# Altium PCB NTC_Extension_5fach.PcbDoc
Units mm, origin at the board's own origin, x right, y up, seen from the top; angles counter-clockwise.
Board outline 139.94 x 69.05 mm, 4 copper layers (Top Layer, Flex Top, Flex Bottom, Bottom Layer), stack 0.359 mm thick; 6 components, 11 nets, 30 pads, 18 vias.
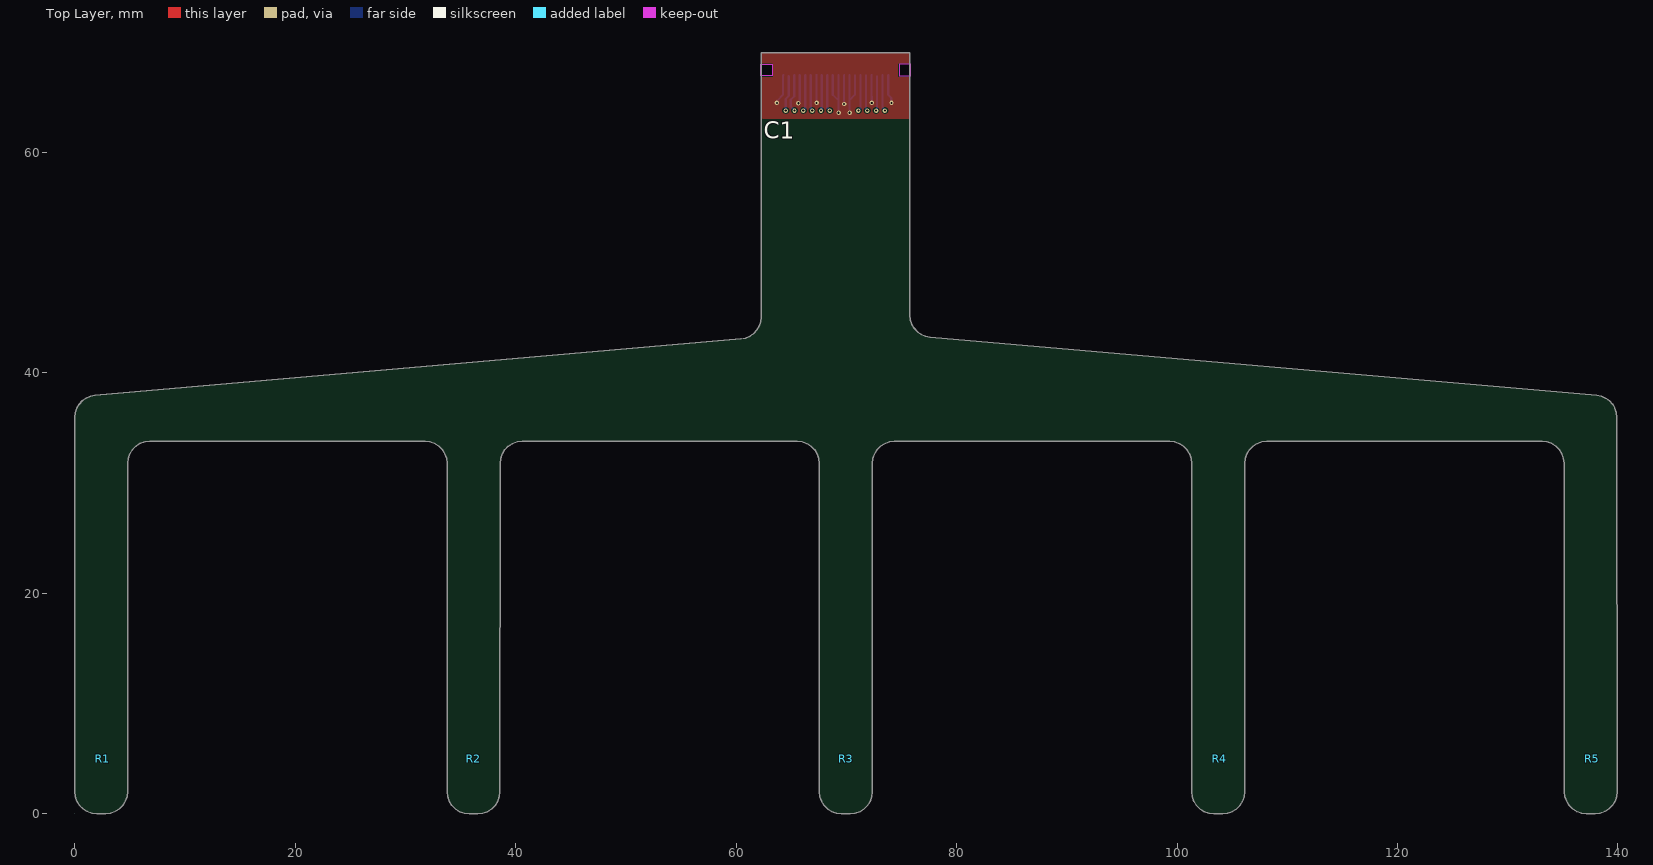
[diagram p0: Top Layer view]
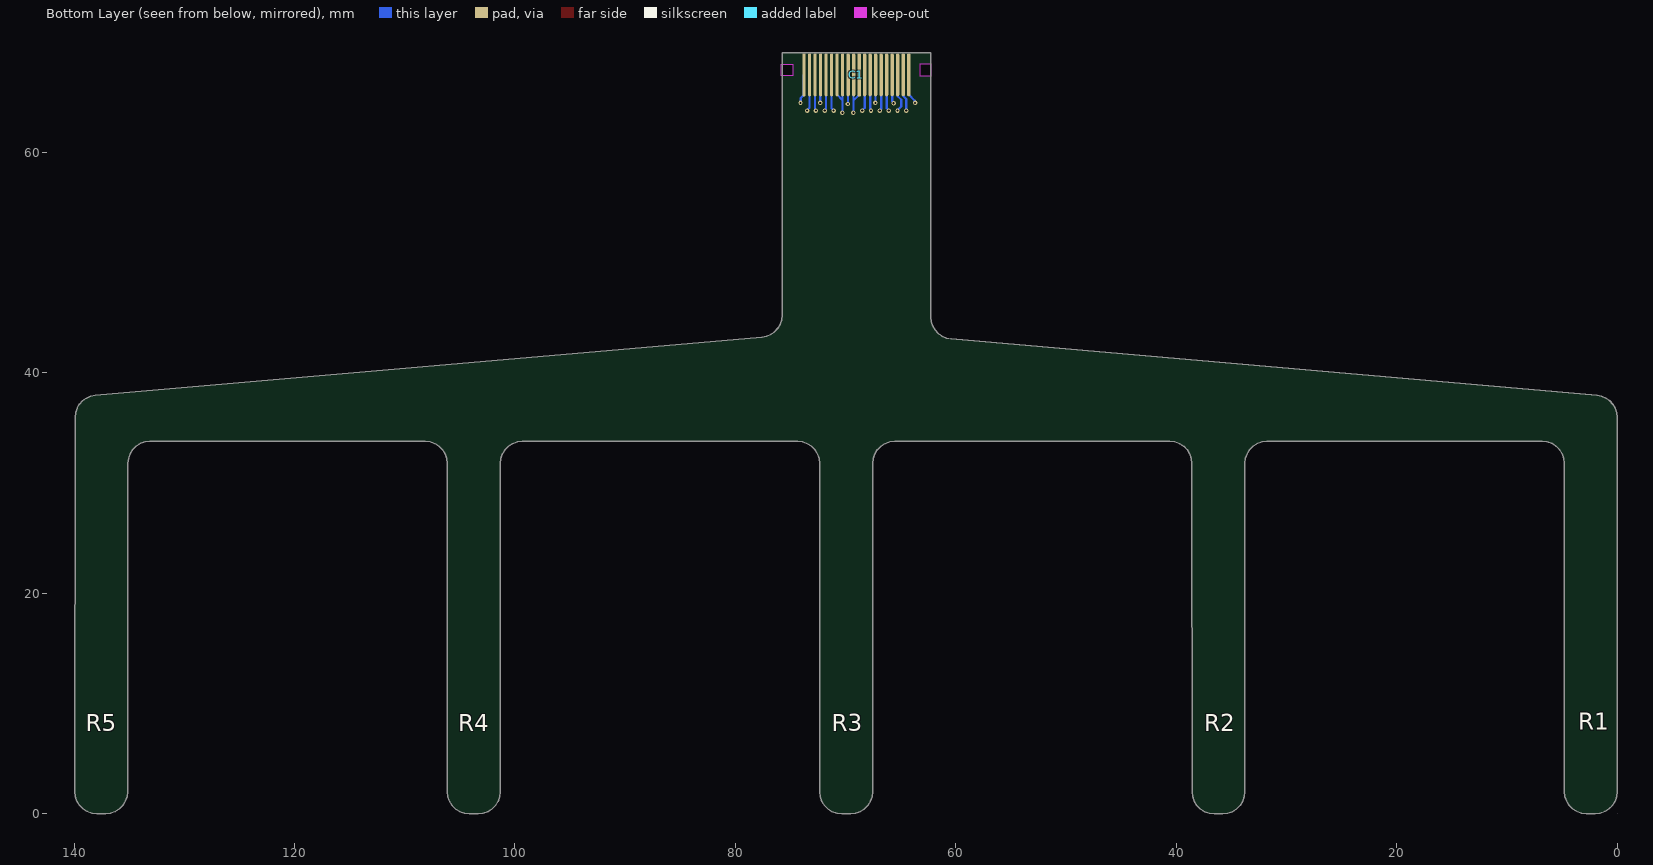
[diagram p1: Bottom Layer view, seen from below]
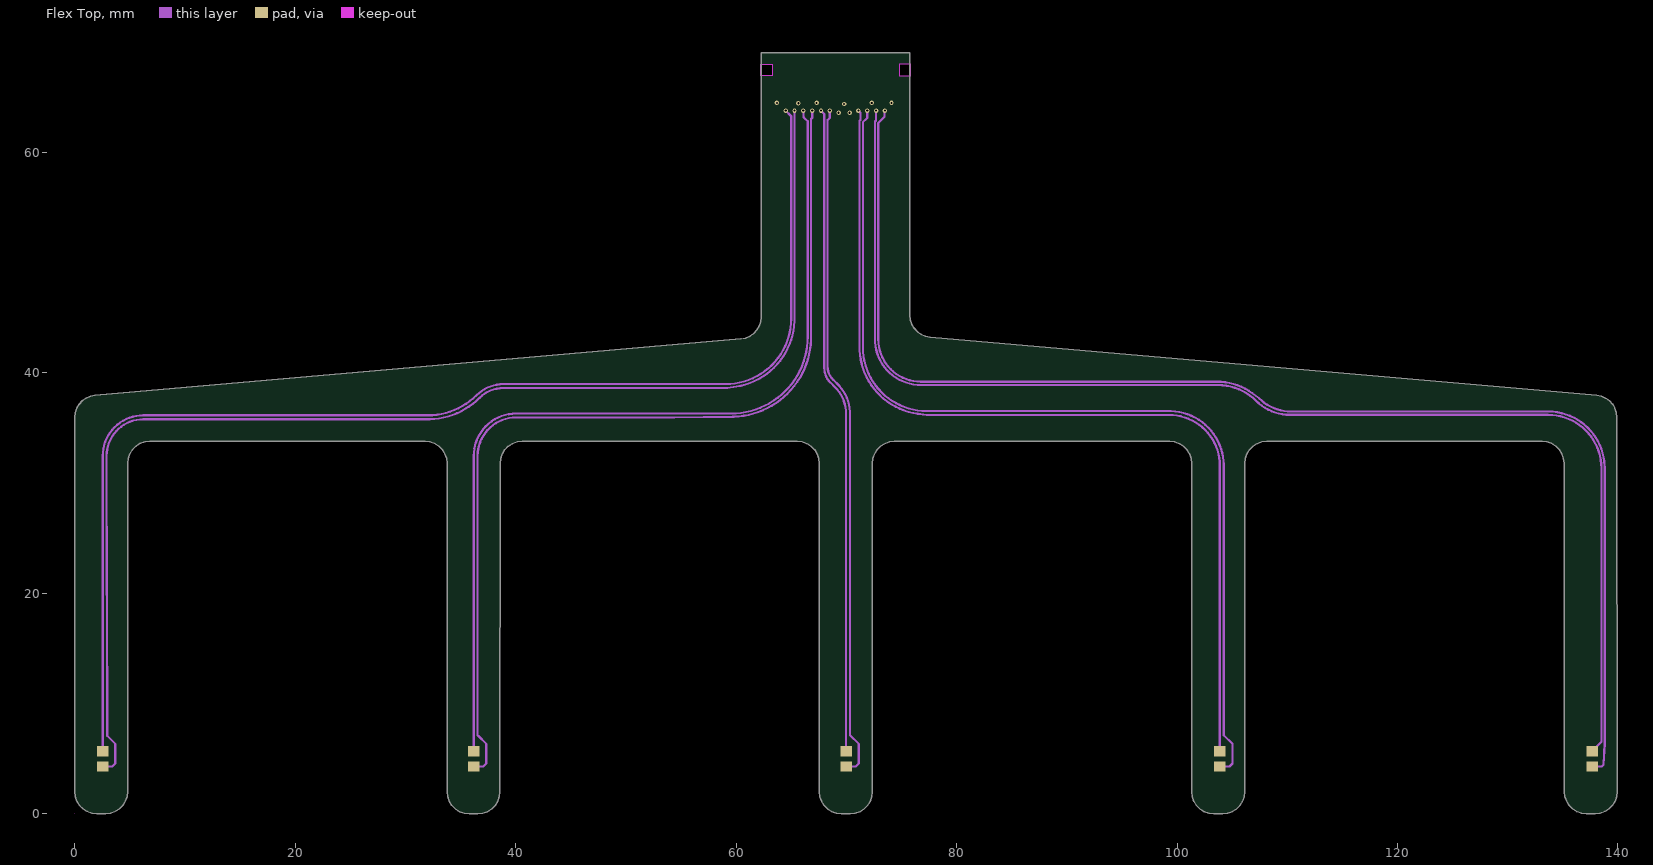
[diagram p2: Flex Top]

## Layer stack, top to bottom
Polyimide 3: solder mask 0.0125, SM-001, Dk 4
Top Layer: signal copper 0.035
Dielectric 2: core 0.086, Core-009, Dk 4.5
Adhesive 4: prepreg 0.015, PP-006, Dk 4.1
Flex Top: signal copper 0.018
Adhesive 3: prepreg 0.013, PP-006, Dk 4.1
Ployimide 2: prepreg 0.025, PP-006, Dk 4.1
Adhesive 2: prepreg 0.013, WE-ADH-0001, Dk 4.1
Flex Bottom: signal copper 0.018
Adhesive 1: prepreg 0.015, PP-006, Dk 4.1
Dielectric 1: core 0.086, Core-009, Dk 4.5
Bottom Layer: signal copper 0.035
Polyimide 1: solder mask 0.0125, SM-001, Dk 4

## Board outline
135.112,31.806 135.141,2.013 135.192,1.568 135.34,1.146 135.579,0.767 135.896,0.45 136.275,0.213 136.698,0.065 137.143,0.015 137.943,0.016 138.388,0.067 138.811,0.215 139.19,0.454 139.506,0.771 139.744,1.15 139.892,1.573 139.941,2.018 139.909,35.977 139.864,36.397 139.731,36.799 139.517,37.164 139.231,37.476 138.886,37.72 138.497,37.887 138.082,37.968 77.596,43.243 77.181,43.324 76.792,43.491 76.447,43.736 76.162,44.047 75.948,44.412 75.815,44.814 75.771,45.235 75.773,52.117 75.775,63.042 75.775,69.042 62.282,69.05 62.275,63.052 62.275,63.042 62.271,52.118 62.272,45.072 62.227,44.651 62.095,44.249 61.881,43.884 61.595,43.573 61.25,43.328 60.861,43.161 60.446,43.08 1.838,37.968 1.423,37.887 1.034,37.721 0.689,37.476 0.403,37.164 0.189,36.799 0.057,36.397 0.012,35.976 0,2.017 0.05,1.572 0.198,1.149 0.436,0.77 0.752,0.453 1.132,0.215 1.554,0.067 1.999,0.017 2.799,0.016 3.244,0.066 3.667,0.214 4.046,0.452 4.363,0.769 4.602,1.148 4.75,1.571 4.8,2.016 4.81,31.807 4.861,32.252 5.009,32.675 5.247,33.054 5.564,33.371 5.943,33.609 6.366,33.757 6.811,33.807 31.785,33.799 32.23,33.749 32.653,33.601 33.032,33.362 33.349,33.045 33.587,32.666 33.735,32.243 33.785,31.798 33.779,2.006 33.829,1.561 33.976,1.139 34.215,0.759 34.531,0.443 34.91,0.204 35.333,0.056 35.778,0.006 36.578,0.006 37.023,0.056 37.446,0.204 37.825,0.442 38.142,0.759 38.38,1.138 38.528,1.56 38.579,2.005 38.585,31.797 38.635,32.242 38.783,32.665 39.022,33.044 39.338,33.361 39.718,33.599 40.14,33.747 40.585,33.797 65.56,33.792 66.005,33.742 66.428,33.594 66.807,33.356 67.123,33.039 67.362,32.66 67.51,32.237 67.56,31.792 67.556,2 67.606,1.555 67.754,1.132 67.993,0.753 68.309,0.437 68.688,0.198 69.111,0.05 69.556,0 70.356,0 70.801,0.05 71.224,0.198 71.603,0.436 71.92,0.753 72.158,1.132 72.306,1.555 72.356,2 72.36,31.792 72.41,32.237 72.558,32.659 72.796,33.038 73.113,33.355 73.492,33.593 73.915,33.741 74.36,33.791 99.335,33.792 99.78,33.742 100.203,33.594 100.582,33.356 100.899,33.04 101.137,32.66 101.285,32.238 101.335,31.793 101.339,2.001 101.389,1.556 101.537,1.133 101.775,0.754 102.092,0.437 102.471,0.199 102.894,0.051 103.339,0.001 104.139,0.001 104.584,0.052 105.007,0.2 105.386,0.438 105.703,0.755 105.941,1.134 106.089,1.557 106.139,2.002 106.135,31.793 106.185,32.239 106.333,32.661 106.571,33.041 106.888,33.357 107.267,33.596 107.69,33.744 108.135,33.794 133.11,33.804 133.555,33.755 133.978,33.607 134.358,33.369 134.675,33.052 134.913,32.673 135.061,32.251
cut-out: 62.227,67.99 63.27,67.99 63.27,66.94 62.227,66.94
cut-out: 75.83,67.99 74.78,67.99 74.78,66.94 75.83,66.94
cut-out: 0,0
cut-out: 0,0
cut-out: 0,0
cut-out: 0,0
cut-out: 0,0
board region STIFF1: 75.775,63.042 75.775,63.045 75.775,69.042 62.282,69.05 62.275,63.052 62.275,63.042
board region FLEX: 139.892,1.573 139.941,2.018 139.909,35.977 139.864,36.397 139.731,36.799 139.517,37.164 139.231,37.476 138.886,37.72 138.497,37.887 138.082,37.968 77.596,43.243 77.181,43.324 76.792,43.491 76.447,43.736 76.162,44.047 75.948,44.412 75.815,44.814 75.771,45.235 75.773,52.117 75.775,63.042 62.275,63.042 62.271,52.118 62.272,45.072 62.227,44.651 62.095,44.249 61.881,43.884 61.595,43.572 61.25,43.328 60.861,43.161 60.446,43.08 1.838,37.968 1.423,37.887 1.034,37.72 0.689,37.476 0.403,37.164 0.189,36.799 0.057,36.397 0.012,35.976 0,2.017 0.05,1.572 0.198,1.149 0.436,0.77 0.753,0.453 1.132,0.215 1.554,0.067 1.999,0.017 2.799,0.016 3.244,0.066 3.667,0.214 4.046,0.452 4.363,0.769 4.602,1.148 4.75,1.571 4.8,2.016 4.81,31.807 4.861,32.252 5.009,32.675 5.247,33.054 5.564,33.371 5.943,33.609 6.366,33.757 6.811,33.807 31.785,33.799 32.23,33.749 32.653,33.601 33.032,33.362 33.349,33.045 33.587,32.666 33.735,32.243 33.785,31.798 33.779,2.006 33.829,1.561 33.976,1.139 34.215,0.759 34.531,0.443 34.91,0.204 35.333,0.056 35.778,0.006 36.578,0.006 37.023,0.056 37.446,0.204 37.825,0.442 38.142,0.759 38.38,1.138 38.528,1.56 38.579,2.005 38.585,31.797 38.635,32.242 38.783,32.665 39.022,33.044 39.338,33.361 39.718,33.599 40.14,33.747 40.585,33.797 65.56,33.792 66.005,33.742 66.428,33.594 66.807,33.356 67.123,33.039 67.362,32.66 67.51,32.237 67.56,31.792 67.556,2 67.606,1.555 67.754,1.132 67.993,0.753 68.309,0.437 68.688,0.198 69.111,0.05 69.556,0 70.356,0 70.801,0.05 71.224,0.198 71.603,0.436 71.92,0.753 72.158,1.132 72.306,1.555 72.356,2 72.36,31.792 72.41,32.237 72.558,32.659 72.796,33.039 73.113,33.355 73.492,33.593 73.915,33.741 74.36,33.791 99.335,33.792 99.78,33.742 100.203,33.594 100.582,33.356 100.899,33.04 101.137,32.66 101.285,32.238 101.335,31.793 101.339,2.001 101.389,1.556 101.537,1.133 101.775,0.754 102.092,0.437 102.471,0.199 102.894,0.051 103.339,0.001 104.139,0.001 104.584,0.052 105.007,0.2 105.386,0.438 105.703,0.755 105.941,1.134 106.089,1.557 106.139,2.002 106.135,31.793 106.185,32.239 106.333,32.661 106.571,33.041 106.888,33.357 107.267,33.596 107.69,33.744 108.135,33.794 133.11,33.804 133.555,33.755 133.978,33.607 134.358,33.369 134.675,33.052 134.913,32.673 135.061,32.251 135.112,31.806 135.141,2.013 135.192,1.568 135.34,1.146 135.579,0.767 135.896,0.45 136.275,0.213 136.698,0.065 137.143,0.015 137.943,0.016 138.388,0.067 138.811,0.215 139.19,0.454 139.506,0.771 139.744,1.15

## Design rules (kind name [scope] priority, off if disabled: settings)
Clearance [All] p1: gap=0.1 ignorepadtopadclearanceinfootprint=FALSE
DiffPairsRouting [All] p1: maxlimit=0.254 minlimit=0.254 mostfreqgap=0.254 toplayer_minwidth=0.381 toplayer_maxwidth=0.381 toplayer_prefwidth=0.381 midlayer1_minwidth=0.381 midlayer1_maxwidth=0.381 midlayer1_prefwidth=0.381 midlayer2_minwidth=0.381 midlayer2_maxwidth=0.381 midlayer2_prefwidth=0.381 bottomlayer_minwidth=0.381 bottomlayer_maxwidth=0.381 bottomlayer_prefwidth=0.381 substack1={291D20B5-A589-4DCC-A0D5-CD3C578C308D} toplayer_{291d20b5-a589-4dcc-a0d5-cd3c578c308d}_minwidth=0.381 toplayer_{291d20b5-a589-4dcc-a0d5-cd3c578c308d}_maxwidth=0.381 toplayer_{291d20b5-a589-4dcc-a0d5-cd3c578c308d}_prefwidth=0.381 midlayer1_{291d20b5-a589-4dcc-a0d5-cd3c578c308d}_minwidth=0.381 midlayer1_{291d20b5-a589-4dcc-a0d5-cd3c578c308d}_maxwidth=0.381 midlayer1_{291d20b5-a589-4dcc-a0d5-cd3c578c308d}_prefwidth=0.381 midlayer2_{291d20b5-a589-4dcc-a0d5-cd3c578c308d}_minwidth=0.381 midlayer2_{291d20b5-a589-4dcc-a0d5-cd3c578c308d}_maxwidth=0.381 midlayer2_{291d20b5-a589-4dcc-a0d5-cd3c578c308d}_prefwidth=0.381 bottomlayer_{291d20b5-a589-4dcc-a0d5-cd3c578c308d}_minwidth=0.381 bottomlayer_{291d20b5-a589-4dcc-a0d5-cd3c578c308d}_maxwidth=0.381 bottomlayer_{291d20b5-a589-4dcc-a0d5-cd3c578c308d}_prefwidth=0.381 maxuncoupledlength=12.7
PolygonConnect PolygonConnect_1 [All vs IsNamedPolygon('GND_L01_P000')] p1: connectstyle=Relief reliefconductorwidth=0.254 reliefentries=4 polygonreliefangle="90 Angle" airgapwidth=0.254
PolygonConnect [All] p2: connectstyle=Relief reliefconductorwidth=0.254 reliefentries=4 polygonreliefangle="90 Angle" airgapwidth=0.254
RoutingVias [All] p1: holewidth=0.711 width=1.27 viastyle="Through Hole" minholewidth=0.711 minwidth=1.27 maxholewidth=0.711 maxwidth=1.27
SolderMaskExpansion [All] p1: expansion=0.102 istentingtop=FALSE
Width [All] p1: maxlimit=0.5 minlimit=0.1 preferedwidth=0.25 substack1={291D20B5-A589-4DCC-A0D5-CD3C578C308D} toplayer_{291d20b5-a589-4dcc-a0d5-cd3c578c308d}_minwidth=0.254 toplayer_{291d20b5-a589-4dcc-a0d5-cd3c578c308d}_maxwidth=0.254 toplayer_{291d20b5-a589-4dcc-a0d5-cd3c578c308d}_prefwidth=0.254 bottomlayer_{291d20b5-a589-4dcc-a0d5-cd3c578c308d}_minwidth=0.254 bottomlayer_{291d20b5-a589-4dcc-a0d5-cd3c578c308d}_maxwidth=0.254 bottomlayer_{291d20b5-a589-4dcc-a0d5-cd3c578c308d}_prefwidth=0.254 minimp=50.000000 maximp=50.000000 favimp=50.000000
29 further rules are at their usual default settings.

## Components (designator, comment, footprint, x,y, rotation, side; value= is the part's Value field where it differs from the comment)
C1 "20Pin Molex FPC" "Molex 20 Pin FPC" 62.28,65.05 r0 top
R1 "ERT-J1VR103J" RESC1608X90X30ML15T20 2.54,4.997 r90 top
R2 "ERT-J1VR103J" RESC1608X90X30ML15T20 36.195,4.997 r90 top
R3 "ERT-J1VR103J" RESC1608X90X30ML15T20 69.977,4.997 r90 top
R4 "ERT-J1VR103J" RESC1608X90X30ML15T20 103.886,4.997 r90 top
R5 "ERT-J1VR103J" RESC1608X90X30ML15T20 137.668,4.997 r90 top

## Footprints (in the part's own frame and the unit in brackets; to place one, negate y for a bottom-side part, rotate by r counter-clockwise, add the part's x,y. Pads: shape width x height; smd on the part's side, far side on the other; paste and mask are expansions set on the pad)
"Molex 20 Pin FPC" [mm]
  rrect50% 0.3x3.9 smd far side: 1(11.5,2) 11(6.5,2)
  oval 0.3x3.9 smd far side: 2(11,2) 3(10.5,2) 4(10,2) 5(9.5,2) 6(9,2) 7(8.5,2) 8(8,2) 9(7.5,2) 10(7,2) 12(6,2) 13(5.5,2) 14(5,2) 15(4.5,2) 16(4,2) 17(3.5,2) 18(3,2) 19(2.5,2) 20(2,2)
RESC1608X90X30ML15T20 [mm] "Chip Resistor, 2-Leads, Body 1.60x0.80mm, IPC Low Density"
  rect 0.95x1.05 on Mid1: 1(-0.7,0) 2(0.7,0)
  body extent -0.88,-0.48 0.87,0.48, height 0.9

## Part data
C1: "Flex PCB part for the Molex 20pin FCC"
R1 R2 R3 R4 R5: library part CMP-2000-00869-1, Manufacturer=Panasonic, Part Number=ERT-J1VR103J

## Via types
v1: diameter 0.4, hole 0.2, Top Layer to Bottom Layer, 18 vias

## Nets (pads, with @x,y where several pads share a name; then routed paths per layer and width w, separated by ;. In a path a pad name is that pad's centre, name@x,y a point inside that pad or via, vN(x,y) a via of type N, cw(c..) or ccw(c..) an arc to the next point about the centre after c; other vN are vias at no path point)
GND: C1.1 C1.4 C1.7 C1.8 C1.9 C1.10 C1.11 C1.14 C1.17 C1.20 | length 27.7
  Bottom Layer w0.2: v1(63.7,64.5) 63.738,64.538 63.738,64.701 64.244,65.207 64.244,67.007 C1.20@64.277,67.04 ; v1(65.649,64.475) 65.649,64.515 65.777,64.643 C1.17@65.777,67.04 ; C1.14@67.277,67.04 67.286,67.031 67.286,65.095 67.3,65.081 v1(67.3,64.5) ; C1.11@68.777,67.04 68.777,65.24 69.277,64.74 ; C1.10@69.277,67.04 69.277,64.74 ; v1(69.3,63.6) 69.3,64.717 69.277,64.74 ; C1.9@69.777,67.04 69.786,67.031 69.786,64.995 69.8,64.981 v1(69.8,64.4) ; C1.8@70.277,67.04 70.277,64.227 70.3,64.204 v1(70.3,63.6) ; 70.3,64.763 70.777,65.24 C1.7@70.777,67.04 ; C1.4@72.277,67.04 72.286,67.031 72.286,65.095 72.3,65.081 v1(72.3,64.5) ; C1.1@73.777,67.04 73.8,67.017 73.8,65.217 74.072,64.945 74.072,64.528 v1(74.1,64.5)
NetC1_2: C1.2 R5.1 | length 124.1
  Flex Top w0.2: v1(73.5,63.8) 73.472,63.772 73.472,63.251 73.263,63.042 72.9,62.679 72.9,43.04 ccw(c76.74,43.05) 76.74,39.21 103.952,39.21 103.994,39.207 104.379,39.157 cw(c103.713,33.984) 106.841,38.158 107.442,37.708 ccw(c110.361,40.63) 110.356,36.5 134.099,36.5 134.522,36.429 cw(c133.669,31.369) 138.795,31.598 138.8,31.484 138.8,6.404 138.688,4.445 138.629,4.387 138.539,4.297 R5.1
  Bottom Layer w0.2: C1.2@73.277,67.04 73.277,64.062 73.5,63.84 v1(73.5,63.8)
NetC1_3: C1.3 R5.2 | length 121.7
  Flex Top w0.2: v1(72.7,63.8) 72.7,63.042 72.7,62.903 72.6,62.803 72.6,42.916 72.609,42.783 ccw(c76.74,43.05) 76.079,38.963 76.468,38.9 103.712,38.9 cw(c103.713,33.984) 107.188,37.462 ccw(c110.231,40.5) 110.234,36.2 133.666,36.2 cw(c133.669,31.369) 138.5,31.364 138.5,6.529 138.441,6.47 R5.2
  Bottom Layer w0.2: v1(72.7,63.8) 72.7,63.84 72.777,63.917 C1.3@72.777,66.917
NetC1_5: C1.5 R4.1 | length 92.4
  Flex Top w0.2: v1(71.9,63.8) 71.9,63.142 71.8,63.042 71.5,62.742 71.5,42.328 ccw(c77.291,42.337) 77.286,36.546 99.424,36.546 ccw(c99.465,36.796) 99.455,36.542 cw(c99.277,31.583) 104.18,32.35 cw(c99.532,31.591) 104.24,31.729 104.24,7.136 105.029,6.347 105.029,4.569 104.757,4.297 R4.1
  Bottom Layer w0.2: C1.5@71.777,67.04 71.777,63.962 71.9,63.84 v1(71.9,63.8)
NetC1_6: C1.6 R4.2 | length 89.6
  Flex Top w0.2: v1(71.1,63.8) 71.1,63.769 71.286,63.583 71.286,63.042 71.286,62.952 71.2,62.866 71.2,42.205 71.206,42.073 ccw(c77.291,42.337) 76.487,36.299 77.294,36.192 99.277,36.192 cw(c99.277,31.583) 103.886,31.582 R4.2
  Bottom Layer w0.2: v1(71.1,63.8) 71.1,63.84 71.277,64.017 C1.6@71.277,67.04
NetC1_12: C1.12 R3.1 | length 64.8
  Flex Top w0.2: v1(68.5,63.8) 68.5,63.142 68.4,63.042 68.3,62.942 68.3,40.583 ccw(c69.968,40.583) 68.817,39.376 69.333,38.86 ccw(c69.544,39.002) 69.355,38.831 cw(c66.57,36.304) 70.327,36.486 70.331,36.451 70.331,34.693 70.331,7.136 71.12,6.347 71.12,4.569 70.848,4.297 R3.1
  Bottom Layer w0.2: C1.12@68.277,67.04 68.277,64.062 68.5,63.84 v1(68.5,63.8)
NetC1_13: C1.13 R3.2 | length 62.1
  Flex Top w0.2: v1(67.7,63.8) 68,63.5 68,63.042 68,40.442 ccw(c69.809,40.442) 68.53,39.163 68.979,38.714 cw(c66.57,36.304) 69.977,36.304 R3.2
  Bottom Layer w0.2: v1(67.7,63.8) 67.7,63.84 67.777,63.917 C1.13@67.777,67.04
NetC1_15: C1.15 R2.1 | length 89.7
  Flex Top w0.2: R2.1 37.066,4.297 37.338,4.569 37.338,6.347 36.623,7.061 36.549,7.136 36.549,32.477 cw(c40.041,32.473) 40.037,35.965 54.382,35.965 59.67,36.019 59.793,36.023 ccw(c59.547,43.272) 66.796,43.026 66.8,43.147 66.8,63.042 66.8,63.056 66.858,63.114 66.9,63.156 v1(66.9,63.8)
  Bottom Layer w0.2: C1.15@66.777,67.04 66.777,63.962 66.9,63.84 v1(66.9,63.8)
NetC1_16: C1.16 R2.2 | length 87.3
  Flex Top w0.2: R2.2 36.195,32.471 ; 36.195,32.473 cw(c40.041,32.473) 40.041,36.319 59.546,36.319 ccw(c59.547,43.272) 66.5,43.272 66.5,62.828 66.286,63.042 66.109,63.219 66.109,63.791 v1(66.1,63.8)
  Bottom Layer w0.2: v1(66.1,63.8) 66.1,63.84 66.277,64.017 C1.16@66.277,67.04
NetC1_18: C1.18 R1.1 | length 120.5
  Flex Top w0.2: R1.1 3.411,4.297 3.683,4.569 3.683,6.347 2.953,7.077 2.894,32.47 cw(c6.222,32.473) 6.217,35.8 32.188,35.8 cw(c32.222,35.549) 32.215,35.803 ccw(c32.041,42.414) 36.719,37.739 cw(c38.877,35.577) 38.873,38.632 47.785,38.632 59.201,38.632 60.029,38.762 ccw(c59.057,44.928) 65.295,44.69 65.3,44.806 65.3,63.042 v1(65.3,63.8)
  Bottom Layer w0.2: C1.18@65.277,67.04 65.268,67.031 65.268,65.093 64.96,64.785 64.96,64.179 65.3,63.84 v1(65.3,63.8)
NetC1_19: C1.19 R1.2 | length 117.8
  Flex Top w0.2: R1.2 2.54,32.471 cw(c6.222,32.473) 6.222,36.154 32.041,36.154 ccw(c32.041,42.414) 36.468,37.989 cw(c38.877,35.577) 38.877,38.986 59.055,38.986 ccw(c59.057,44.928) 65,44.931 65,63.042 65,63.3 64.941,63.359 v1(64.5,63.8)
  Bottom Layer w0.2: v1(64.5,63.8) 64.5,64.849 C1.19@64.777,65.126 ; C1.19@64.777,66.917 64.786,66.926 C1.19@64.786,65.126

## Polygon pours and split planes (outlines as drawn)
GND on Top Layer "GND_L01_P000" (solid, pour order 0): 62.282,69.05 75.767,69.05 75.775,69.042 75.775,63.045 62.281,63.045 62.275,63.052

## Silkscreen, mask and mechanical layers (free items; w line width, h text height)
Board Outline:
  lines w0.1: 2,0.015 cw(c2.12,2.12) 0.014,2.031 0.014,35.976 cw(c2.02,35.97) 1.838,37.968 60.46,43.08 ; 2,0.016 2.799,0.016 ccw(c2.71,2.12) 4.813,2.015 ; 4.794,31.797 cw(c6.87,31.73) 6.811,33.807 31.777,33.807 ; 4.8,2.016 4.8,31.797 ; 31.778,33.815 cw(c31.73,31.76) 33.785,31.76 ; 33.785,31.798 33.785,2.013 ccw(c35.76,1.98) 35.778,0.005 ; 35.778,0.006 36.578,0.006 ccw(c36.59,1.99) 38.574,2.005 ; 38.579,2.005 38.579,31.791 ; 38.583,31.797 cw(c40.6,31.78) 40.585,33.797 65.555,33.797 ; 60.446,43.08 ccw(c60.32,45.04) 62.278,44.891 62.279,45.072 62.28,65.05 ; 65.555,33.79 cw(c65.56,31.79) 67.56,31.79 ; 67.556,2 ccw(c69.58,2.03) 69.556,0.006 ; 67.56,2.004 67.56,31.792 ; 69.556,0 70.356,0 ccw(c70.35,2.01) 72.36,2 ; 72.349,31.792 cw(c74.42,31.72) 74.36,33.791 99.334,33.791 ; 72.356,2 72.356,31.788 ; 75.771,45.235 ccw(c77.76,45.23) 77.62,43.246 ; 75.78,45.244 75.78,65.05 ; 77.62,43.24 138.082,37.968 ; 99.335,33.785 cw(c99.36,31.81) 101.335,31.81 ; 101.335,31.793 101.335,2.005 ccw(c103.37,2.04) 103.339,0.005 ; 103.339,0.001 104.139,0.001 ccw(c104.12,2.03) 106.149,2.002 ; 106.139,2.002 106.139,31.79 ; 106.146,31.79 cw(c108.19,31.75) 108.135,33.794 133.1,33.794 ; 133.1,33.791 cw(c133.18,31.86) 135.113,31.86 ; 135.112,31.806 135.112,2.043 ccw(c137.15,2.06) 137.143,0.022 ; 137.143,0.015 137.943,0.015 ccw(c137.92,2.04) 139.945,2.018 ; 138.081,37.965 cw(c137.8,35.84) 139.944,35.84 ; 139.941,2.018 139.941,35.944